# Altium PCB APM_OSD+.PcbDoc
Units mil, origin at the board's own origin, x right, y up, seen from the top; angles counter-clockwise.
Board outline 6000 x 4000 mil, 2 copper layers (Top Layer, Bottom Layer); 16 components, 18 nets, 67 pads, 14 vias.
Unrouted connection lines stored in the file: 1.
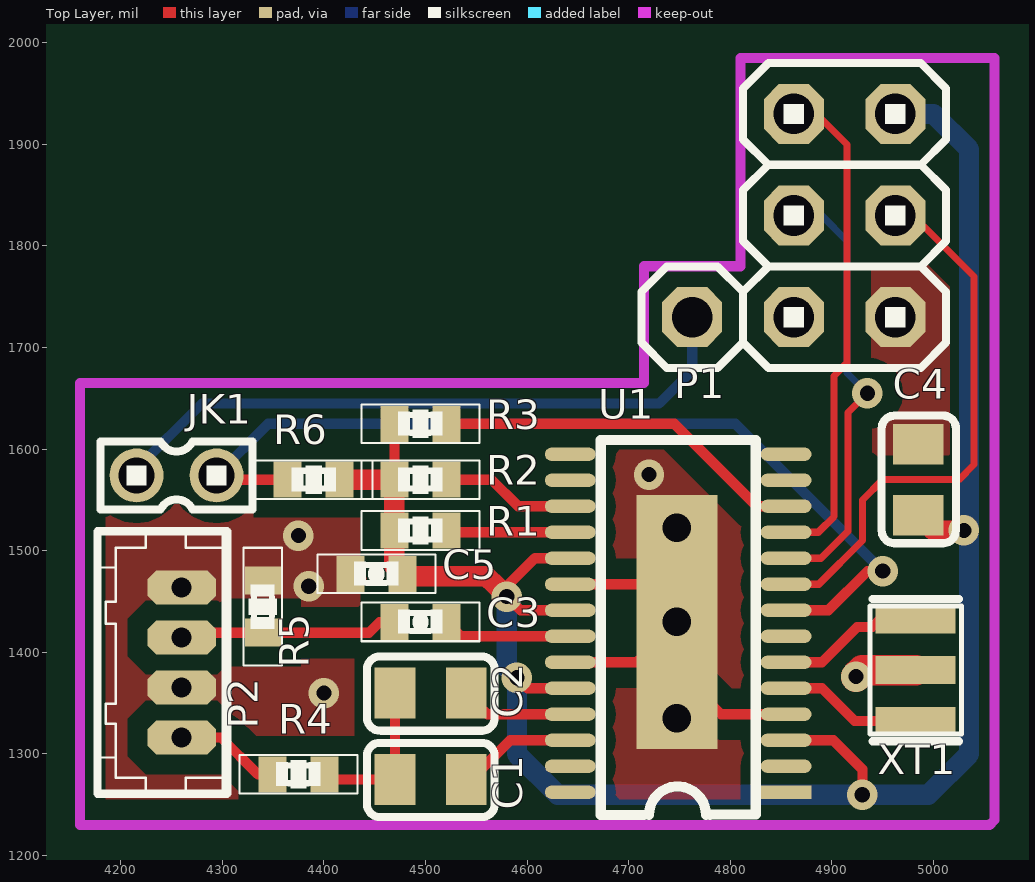
[diagram p0: Top Layer view]
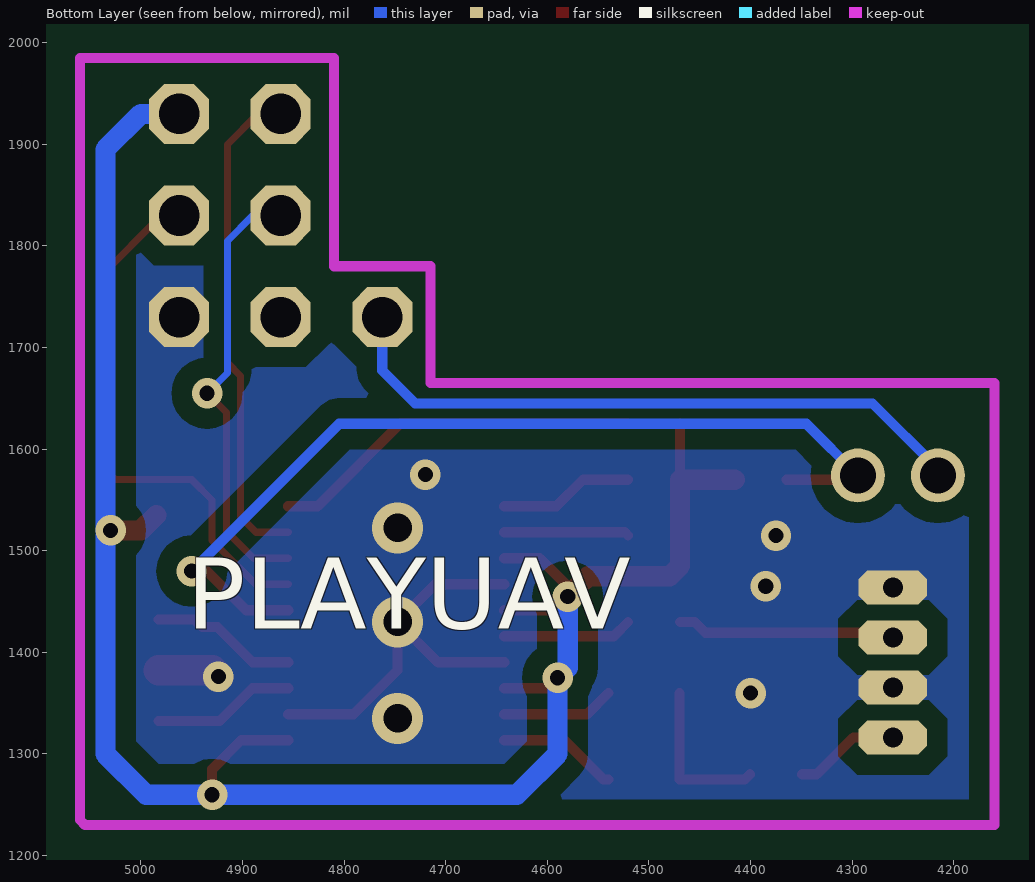
[diagram p1: Bottom Layer view, seen from below]

## Layer stack, top to bottom
Top Solder: solder mask 0.4, Solder Resist, Dk 3.5
Top Layer: signal copper 1.4
Dielectric 1: dielectric 12.6, FR-4, Dk 4.8
Bottom Layer: signal copper 1.4
Bottom Solder: solder mask 0.4, Solder Resist, Dk 3.5

## Board outline
1000,1000 7000,1000 7000,5000 1000,5000

## Design rules (kind name [scope] priority, off if disabled: settings)
Clearance Clearance_1 [InPolygon] p1: gap=20
Clearance [All] p2: gap=7
ComponentClearance [All] p1: gap=0 collisioncheckmode=3 verticalgap=0 showdistances=FALSE
PlaneConnect [All] p1: planeconnectstyle=Direct reliefexpansion=20 reliefentries=4 reliefconductorwidth=10 reliefairgap=10
PolygonConnect [All] p1: connectstyle=Direct reliefconductorwidth=10 reliefentries=4 polygonreliefangle="90 Angle" airgapwidth=10
RoutingVias [All] p1: holewidth=15 width=30 viastyle="Through Hole" minholewidth=15 minwidth=30 maxholewidth=15 maxwidth=30
SolderMaskExpansion [All] p1: expansion=4
Width [All] p1: maxlimit=100 minlimit=7 preferedwidth=100
28 further rules are at their usual default settings.

## Components (designator, comment, footprint, x,y, rotation, side; value= is the part's Value field where it differs from the comment)
C1 "4.7uF" 0805C 4505,1275 r0 top
C2 "4.7uF" 0805C 4505,1360 r0 top
C3 "104" 0402-CAP 4495,1430 r180 top
C4 "4.7uF" 0805C 4985,1570 r90 top (schematic designator C2)
C5 "104" 0402-CAP 4451.67,1477.28 r180 top (schematic designator C3)
JK1 "CON2" 1X02-2.0 4255,1570 r180 top
P1 "Header 7" OSD_7P 4885,1805 r0 top
P2 "CON4" DF13-4P-1.25DSA 4260,1390 r90 top
R1 "1k" 0402-RES 4495,1520 r0 top
R2 "1K" 0402-RES 4495,1570 r180 top
R3 "1K" 0402-RES 4495,1625 r180 top
R4 "75" 0402-RES 4375,1280 r180 top
R5 "75" 0402-RES 4340,1445 r270 top
R6 "1K" 0402-RES 4390,1570 r180 top (schematic designator R2)
U1 "MAX7456EUI" SSOP-28 4885,1260 r180 top
XT1 "27MHZ" 27MHZ 4985,1385 r90 top

## Footprints (in the part's own frame and the unit in brackets; to place one, negate y for a bottom-side part, rotate by r counter-clockwise, add the part's x,y. Pads: shape width x height; smd on the part's side, far side on the other; paste and mask are expansions set on the pad)
1X02-2.0 [mm]
  round 1.35 hole 0.9: 1(-1,-0.106) 2(1,-0.106)
  silkscreen extent -1.9,-0.96 1.9,0.74
27MHZ [mil]
  rect 27.56x78.74 smd: 1(-52.5,2.5) 2(47.5,2.5) 3(-2.5,2.5)
  silkscreen extent -72,-43 68,48
0402-CAP [mm]
  rect 0.7x0.9 smd: 1(-0.65,0) 2(0.65,0)
  silkscreen extent -1.47,-0.48 1.47,0.48
0402-RES [mm]
  rect 0.7x0.9 smd: 1(-0.65,0) 2(0.65,0)
  silkscreen extent -1.47,-0.48 1.47,0.48
0805C [mil]
  rect 40x50 smd: 1(35,0) 2(-35,0)
  silkscreen extent -63,-37 63,36
DF13-4P-1.25DSA [mm]
  oct 0.856x1.711 hole 0.5: 1(-1.875,0) 2(-0.625,0) 3(0.625,0) 4(1.875,0)
  silkscreen extent -3.35,-1.2 3.35,2.13
OSD_7P [mil]
  oct 59.06x59.06 hole 40: 1(-22.5,125) 2(77.5,125) 3(-22.5,25) 4(77.5,25) 5(-22.5,-75) 6(77.5,-75) 7(-122.5,-75)
  silkscreen extent -172,-125 128,175
SSOP-28 [mil]
  rect 50x12.99 smd: 1(30,-2.32)
  oval 50x12.99 smd: 2(30,-27.91) 3(30,-53.5) 4(30,-79.1) 5(30,-104.69) 6(30,-130.28) 7(30,-155.87) 8(30,-181.46) 9(30,-207.05) 10(30,-232.64) 11(30,-258.23) 12(30,-283.82) 13(30,-309.41) 14(30,-335) 15(242.5,-335) 16(242.5,-309.41) 17(242.5,-283.82) 18(242.5,-258.23) 19(242.5,-232.64) 20(242.5,-207.05) 21(242.5,-181.46) 22(242.5,-155.87) 23(242.5,-130.28) 24(242.5,-104.68) 25(242.5,-79.1) 26(242.5,-53.5) 27(242.5,-27.91) 28(242.5,-2.32)
  rect 80x250 smd: 4(137.5,-170)
  silkscreen extent 60,-349 213,20

## Part data
C1 C2 C4: library part ELECTRO1, "Electrolytic Capacitor 1"
C3 C5: library part CAP, "Capacitor"
JK1 P2: library part CO, "Connector"
P1: "Header, 7-Pin"
R1 R2 R3 R4 R5 R6: library part Res1, "Resistor"
U1: library part MAX7456
XT1: library part 晶振3脚

## Via types
v1: diameter 30, hole 15, Top Layer to Bottom Layer, 11 vias
v2: diameter 50, hole 28, Top Layer to Bottom Layer, 3 vias

## Nets (pads, with @x,y where several pads share a name; then routed paths per layer and width w, separated by ;. In a path a pad name is that pad's centre, name@x,y a point inside that pad or via, vN(x,y) a via of type N, cw(c..) or ccw(c..) an arc to the next point about the centre after c; other vN are vias at no path point)
+5V: C4.2 C5.1 P1.2 R1.1 R2.2 R3.2 R6.1 U1.3 U1.19 U1.21 U1.24 | length 2010
  Top Layer w10: R2.2 R3.2 ; v1@4570,1465 4580,1465 4607.64,1492.64 U1.19 ; v1(4580,1455) 4593.54,1441.46 U1.21 ; v1(4590,1375) 4600.31,1364.68 U1.24 ; U1.3 4901.5,1313.5 4930,1285 v1(4930,1260)
  Top Layer w20: R6.1 R2.2 R1.1 4469.41,1485.13 C5.1 4479.54,1475 4560,1475 4570,1465 v1(4580,1455) ; C4.2 5000,1520 v1(5030,1520)
  Bottom Layer w20: v1(4580,1455) 4580,1385 v1(4590,1375) 4590,1300 4630,1260 v1(4930,1260) 4995,1260 5035,1300 5035,1515 v1(5030,1520) ; P1.2 5000,1930 5035,1895 v1@5035,1520
CLKIN: U1.5 XT1.1 | length 140.8
  Top Layer w10: U1.5 4890.31,1364.69 4922.5,1332.5 XT1.1
GND: C4.1 C5.2 P1.6 P2.2 P2.4 R5.1 U1.4 U1.20 U1.23 XT1.3 | length 477.9
  Top Layer w10: U1.23 4707.78,1390.28 v2(4747.5,1430) ; U1.20 4710.45,1467.05 v2(4747.5,1430) ; U1.4@4855,1339.1 4790.9,1339.1 4747.5,1382.5 v2(4747.5,1430) ; v1@4922.5,1377.5 v1(4923.75,1376.25)
  Top Layer w30: v1(4923.75,1376.25) 4930,1382.5 XT1.3
  other v1: 4400,1360 4385,1465 4375,1515 4720,1575
  other v2: 4747.5,1335 4747.5,1522.5
HSYNC: R1.2 U1.18 | length 123.2
  Top Layer w10: R1.2@4520.59,1515 4523.82,1518.23 U1.18
LOS: R3.1 U1.12 | length 368
  Top Layer w10: R3.1 4745,1625 4826.18,1543.82 U1.12
MAX7456_CS: JK1.1 JK1.2 P1.7 R6.2 U1.8 | length 1565.4
  Top Layer w10: JK1.1 4298.54,1570 R6.2 ; U1.8 4896.46,1441.46 4935,1480 v1(4950,1480)
  Bottom Layer w10: JK1.2 4215.63,1580.63 4280,1645 4730,1645 4762.5,1677.5 P1.7 ; JK1.1 4345.2,1625 4805,1625 v1(4950,1480)
MISO: P1.1 U1.11 | length 490.1
  Top Layer w7: U1.11 4886.66,1518.23 4902,1533.57 4902,1672 4915,1685 4915,1900 4885,1930 P1.1
MOSI: P1.4 U1.9 | length 544.6
  Top Layer w7: U1.9 4887.05,1467.05 4930,1510 4930,1550 4950,1570 5025,1570 5040,1585 5040,1770 4980,1830 P1.4
NetC1_1: C1.1 U1.26 | length 118.4
  Top Layer w10: C1.1 4545,1275 4583.5,1313.5 U1.26
NetC1_2: C1.2 C2.2 R4.1 | length 156.5
  Top Layer w10: R4.1 4405.59,1275 C1.2 C2.2
NetC2_1: C2.1 U1.25 | length 111.2
  Top Layer w10: C2.1 4560.9,1339.1 U1.25
NetC3_1: C3.1 U1.22 | length 127.8
  Top Layer w10: C3.1 4534.72,1415.87 U1.22
RST: P1.5
SCLK: P1.3 U1.10 | length 436.8
  Top Layer w7: U1.10 4889.35,1492.64 4916,1519.28 4916,1636 v1(4935,1655)
  Bottom Layer w7: P1.3 4890,1830 4915,1805 4915,1675 v1(4935,1655)
VIN: C3.2 P2.3 R5.2 | length 215.8
  Top Layer w10: P2.3 4264.8,1419.41 R5.2 4444.41,1419.41 4455,1430 C3.2
VOUT: P2.1 R4.2 | length 104.4
  Top Layer w10: P2.1 4298.82,1316.18 4335,1280 R4.2
VSYNC: R2.1 U1.17 | length 132.8
  Top Layer w10: R2.1 4565,1570 4591.18,1543.82 U1.17
XFB: U1.6 XT1.2 | length 145
  Top Layer w10: U1.6 4890.28,1390.28 4925,1425 4940,1425 4947.5,1432.5 XT1.2
pads on no net: U1.1 U1.2 U1.7 U1.13 U1.14 U1.15 U1.16 U1.27 U1.28

## Polygon pours and split planes (outlines as drawn)
GND on Top Layer "Top Overlay-No Net" (solid, remove dead copper, pour order 2): 4810,1985 5060,1985 5060,1235 5057.5,1232.5 5055,1230 4160,1230 4160,1660 4160,1665 4715,1665 4715,1780 4810,1780 4810,1985
GND on Bottom Layer "Top Overlay-No Net" (solid, remove dead copper, pour order 3): 4810,1985 5060,1985 5060,1235 5057.5,1232.5 5055,1230 4160,1230 4160,1660 4160,1665 4715,1665 4715,1780 4810,1780 4810,1985

## Keep-outs
Keep-Out Layer:
  lines w10: 4160,1230 4160,1665 4715,1665 4715,1780 4810,1780 4810,1985 5060,1985 5060,1235 5055,1230 4160,1230

## Silkscreen, mask and mechanical layers (free items; w line width, h text height)
Bottom Overlay:
  text "PLAYUAV" at 4955,1400 h120

## Dimensions
4810,1985 to 5055,1230 on Top Overlay
4160,1665 to 5060,1985 on Top Overlay